# EAGLE board layout (EAGLE 6.1)
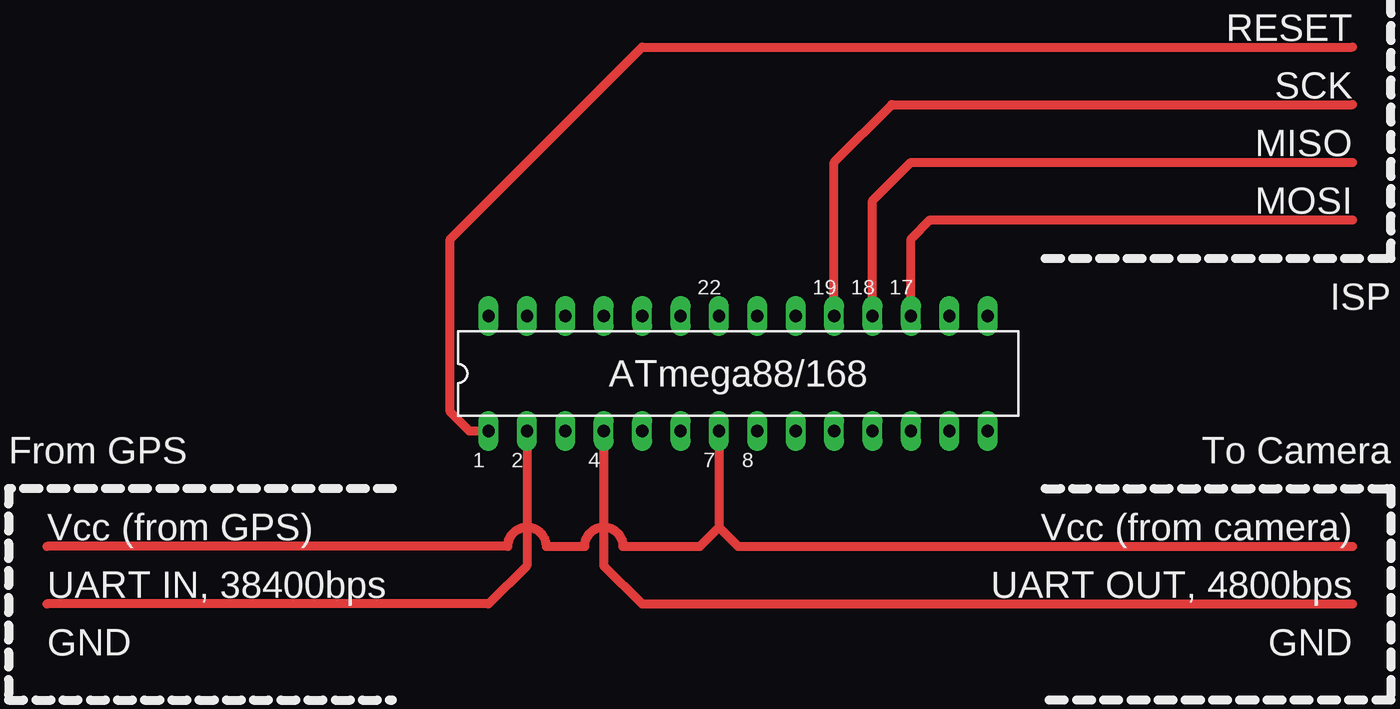
[diagram p0: board, top side]
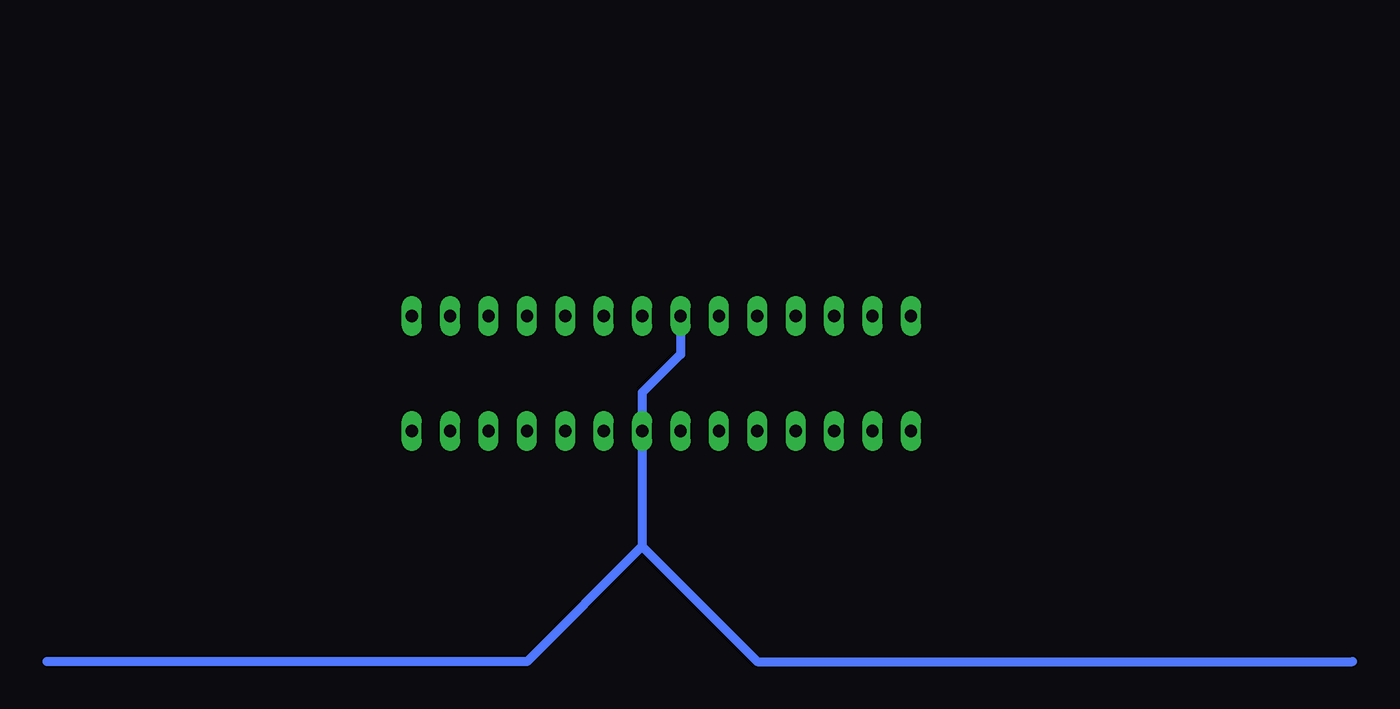
[diagram p1: board, bottom side, seen from below]

No outline drawn. Coordinates in mm, seen from the top.
Copper layers (1*16): Top 0.035mm / dielectric 1.5mm / Bottom 0.035mm
Design rules: minimum track width 10mil, minimum drill 24mil, track to track 8mil, track to pad 8mil, pad to pad 8mil, via to via 8mil, smd to smd 8mil, copper to edge 40mil, drill to drill 8mil, minimum pad ring 10mil, minimum via ring 8mil, stop-mask expansion 4mil, vias tented up to drill 0mil, thermal gap 10mil

## Footprints (pad centres in the part's own frame; a part is rotated, then mirrored left to right if it is on the bottom)
DIL28-3 = drill 0.813 long: 1 -16.51,-3.81; 2 -13.97,-3.81; 3 -11.43,-3.81; 4 -8.89,-3.81; 5 -6.35,-3.81; 6 -3.81,-3.81; 7 -1.27,-3.81; 8 1.27,-3.81; 9 3.81,-3.81; 10 6.35,-3.81; 11 8.89,-3.81; 12 11.43,-3.81; 13 13.97,-3.81; 14 16.51,-3.81; 15 16.51,3.81; 16 13.97,3.81; 17 11.43,3.81; 18 8.89,3.81; 19 6.35,3.81; 20 3.81,3.81; 21 1.27,3.81; 22 -1.27,3.81; 23 -3.81,3.81; 24 -6.35,3.81; 25 -8.89,3.81; 26 -11.43,3.81; 27 -13.97,3.81; 28 -16.51,3.81

## Placement (x,y rotation side)
E$1  [DIL28-3]  48.26,17.78 0 top

## Library data of the parts
E$1 = avr-4

## Nets
S$1: E$1.2
S$2: E$1.4
S$4: E$1.1
S$5: E$1.8 E$1.22
S$7: E$1.17
S$8: E$1.18
S$9: E$1.19
S$10: E$1.7

## Tracks (layer width: path | path; a pad name or v marks a point on that pad's centre or on a via)
S$1
  Top 0.61: E$1.2 34.29,5.08 31.75,2.54 2.54,2.54
S$2
  Top 0.61: E$1.4 39.37,5.08 41.91,2.54 88.9,2.54
S$4
  Top 0.61: E$1.1 30.48,13.97 29.21,15.24 29.21,26.67 41.91,39.37 88.9,39.37
S$5
  Bottom 0.61: E$1.22 46.99,19.05 49.53,16.51 E$1.8 49.53,6.35 | 49.53,6.35 57.15,-1.27 88.9,-1.27 | 49.53,6.35 41.91,-1.27 2.54,-1.27
S$6
  Top 0.61: 33.02,6.35 2.54,6.35
S$7
  Top 0.61: E$1.17 59.69,26.67 60.96,27.94 88.9,27.94
S$8
  Top 0.61: E$1.18 57.15,29.21 59.69,31.75 88.9,31.75
S$9
  Top 0.61: E$1.19 54.61,31.75 58.42,35.56 88.9,35.56
S$10
  Top 0.61: 33.02,6.35 arc-180 35.56,6.35 38.1,6.35 arc-180 40.64,6.35 45.72,6.35 46.99,7.62 | E$1.7 46.99,7.62 | 46.99,7.62 48.26,6.35 88.9,6.35

## Text on the board
tNames: RESET | SCK | MISO | MOSI | 22 | 19 | 18 | 17 | ISP | ATmega88/168 | From GPS | To Camera | 1 | 2 | 4 | 7 | 8 | Vcc (from GPS) | Vcc (from camera) | UART IN, 38400bps | UART OUT, 4800bps | GND | GND | Note: do not connect camera and GPS Vcc together!